# Altium PCB PCB.PcbDoc
Units mm, origin at the board's own origin, x right, y up, seen from the top; angles counter-clockwise.
Board outline 24 x 9 mm, 2 copper layers (Top Layer, Bottom Layer), stack 1.57 mm thick; 16 components, 9 nets, 36 pads, 19 vias.
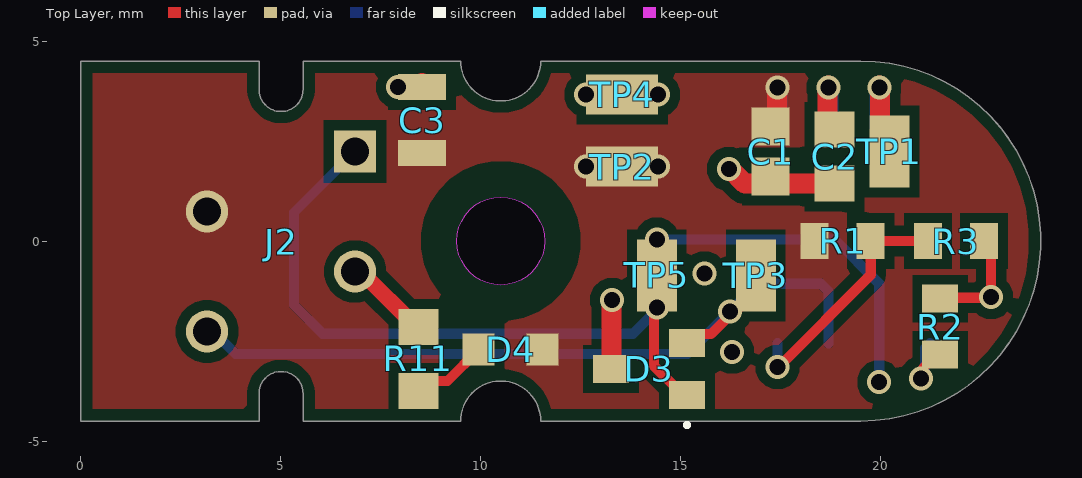
[diagram p0: Top Layer view]
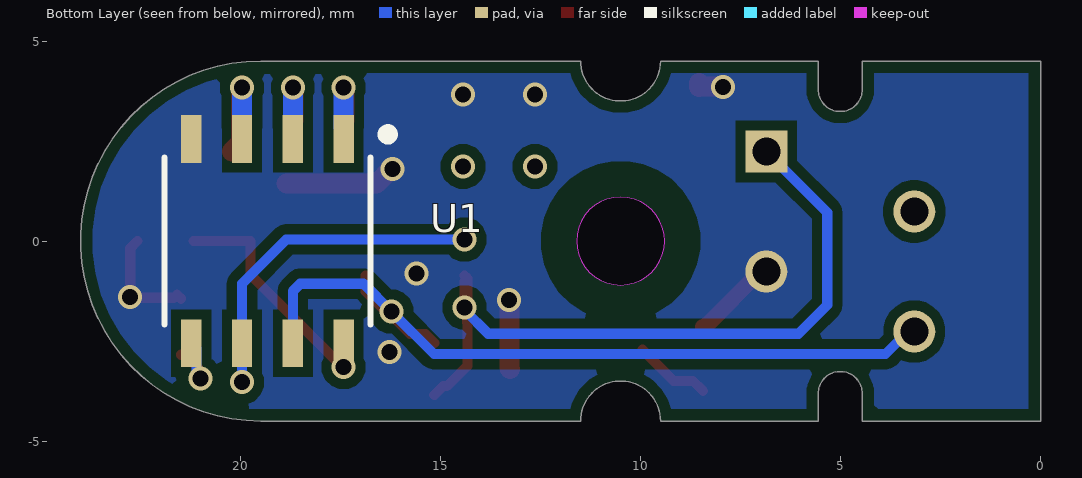
[diagram p1: Bottom Layer view, seen from below]
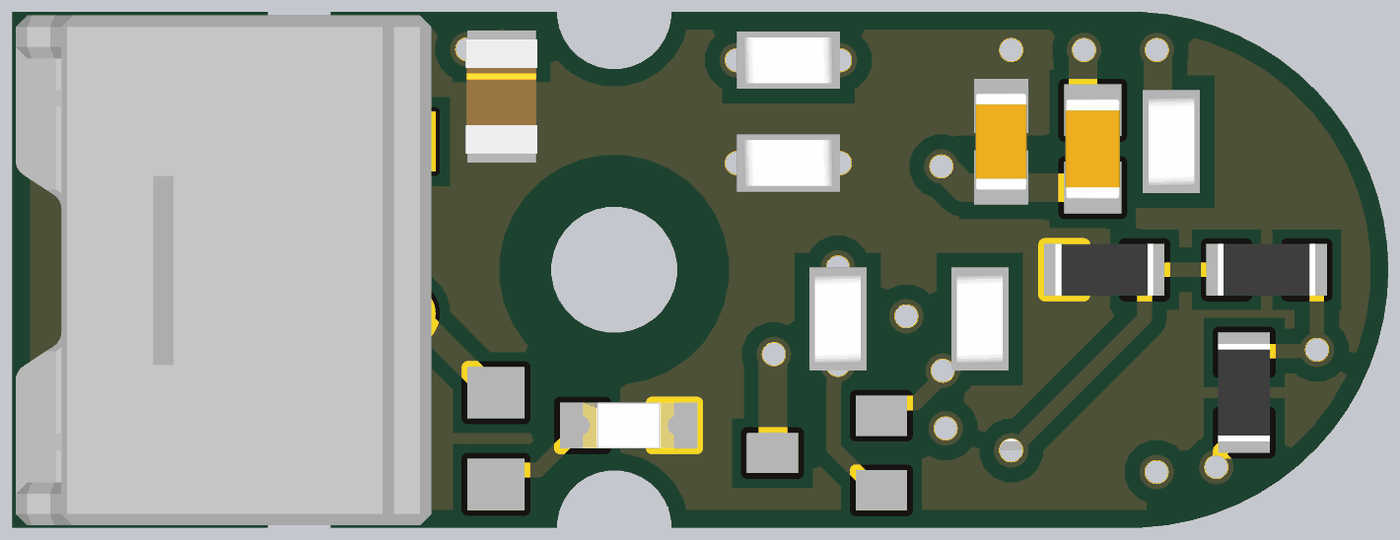
[diagram p2: 3D render of the assembled board from above, using the file's embedded part models]

## Layer stack, top to bottom
Top Solder: solder mask 0.01, Solder Resist, Dk 3.5
Top Layer: signal copper 0.035
Dielectric 1: dielectric 1.5, FR-4, Dk 4.8
Bottom Layer: signal copper 0.035
Bottom Solder: solder mask 0.01, Solder Resist, Dk 3.5

## Board outline
4.458,-4.5 4.458,-3.812 cw(c5.008,-3.812) 5.558,-3.812 5.558,-4.5 9.5,-4.5 cw(c10.5,-4.5) 11.5,-4.5 19.5,-4.5 ccw(c19.5,0) 19.5,4.5 11.5,4.5 cw(c10.5,4.5) 9.5,4.5 5.558,4.5 5.558,3.788 cw(c5.008,3.788) 4.458,3.788 4.458,4.5 0,4.5 0,-4.5
cut-out: 10.5,-1.1 cw(c10.5,0) 9.4,0 cw(c10.5,0) 10.5,1.1 cw(c10.5,0) 11.6,0 cw(c10.5,0)

## Design rules (kind name [scope] priority, off if disabled: settings)
AcuteAngle [All] p1: minimum=6.00000000000000E+0001 checktracksonly=FALSE
AssemblyTestPointUsage [All] p1: valid=2
BoardOutlineClearance [All] p1: gap=0.3 ignorepadtopadclearanceinfootprint=FALSE except(0: Arc-OutlineEdge Arc-CavityEdge Arc-CutoutEdge Arc-SplitBarrior Arc-SplitContinuation Track-SplitContinuation SMDPad-SplitContinuation THPad-SplitContinuation Via-SplitContinuation Fill-SplitContinuation Poly-SplitContinuation Region-SplitContinuation Text-SplitContinuation; 0.254: Region-OutlineEdge Region-CavityEdge Region-CutoutEdge Region-SplitBarrior Text-OutlineEdge Text-CavityEdge Text-CutoutEdge Text-SplitBarrior)
Clearance [All] p1: gap=0.254 ignorepadtopadclearanceinfootprint=TRUE except(0: Arc-Hole Track-Hole SMDPad-Hole THPad-Hole Via-Hole Fill-Hole Poly-Hole Region-Hole Text-Hole)
FabricationTestPointUsage [All] p1: valid=2 allowmultiple=FALSE
HoleSize [All] p1: absolutevalues=TRUE maxlimit=6.3 minlimit=0.025 maxpercent=80.000 minpercent=20.000
MinimumSolderMaskSliver [All] p1: minsoldermaskwidth=0.1
NetAntennae [All] p1 off: netantennaetolerance=1
PolygonConnect Vias [IsVia] p1: connectstyle=Direct reliefconductorwidth=0.254 reliefentries=4 polygonreliefangle="90 Angle" airgapwidth=0.254
PolygonConnect DirectClass [InPadClass('Direct')] p2: connectstyle=Direct reliefconductorwidth=0.254 reliefentries=4 polygonreliefangle="90 Angle" airgapwidth=0.254
PolygonConnect [All] p3: connectstyle=Relief reliefconductorwidth=0.254 reliefentries=4 polygonreliefangle="90 Angle" airgapwidth=0.254
RoutingVias [All] p1: holewidth=0.4 width=0.6 viastyle="Through Hole" minholewidth=0.3 minwidth=0.5 maxholewidth=1 maxwidth=2
SolderMaskExpansion [All] p1: expansion=0.102 istentingtop=FALSE
UnRoutedNet [All] p1: checkbadconnections=TRUE
Width [All] p1: maxlimit=1 minlimit=0.254 preferedwidth=0.254
24 further rules are at their usual default settings.

## Classes and differential pairs
pad class Direct: C1-2 C2-2 C3-1 C3-2 D4-2 J2-2 J2-3 R1-1 R1-2 TP2-1 TP4-1 U1-1 U1-2 U1-4
component class Encoder: C1 C2 R1 R2 R3 TP1 U1
component class Connectors: C3 D3 D4 J2 R11 TP2 TP3 TP4 TP5

## Components (designator, comment, footprint, x,y, rotation, side; value= is the part's Value field where it differs from the comment)
C1 "Capacitor 100 nF +/-10% 50 V 0603" CAPC1608X90X40NL10T20 17.249,2.235 r90 top value=100nF
C2 "Capacitor 1uF +/- 10% 16V 0603" CAPC1608X90X35NL15T15 18.847,2.109 r90 top value=1µF
C3 "CAP CER 10UF 16V X5R 0805" "CAP CER 10UF 16V X5R 0805-Footprint-1" 8.534,3.023 r270 top value=10µF
D3 "DF3A6.8FUT1G" ONSC-SC-70-3-419-04_V 14.209,-3.199 r180 top
D4 "150060RS75000" WL-SMCW_0603_150060xx75000 10.75,-2.718 r0 top
J2 "5031750400" 5031750400-Footprint-1 6.858,2.238 r270 top
R1 "Resistor 10k +/-1% 0603 100 mW" RESC1608X55X25NL10T15 19.05,0 r180 top value=10k
R2 "Resistor 10k +/-1% 0603 100 mW" RESC1608X55X25NL10T15 21.487,-2.143 r90 top value=10k
R3 "Resistor 10k +/-1% 0603 100 mW" RESC1608X55X25NL10T15 21.881,0 r180 top value=10k
R11 "RC0603JR-07180RL" RESC0603(1608)_N 8.439,-2.946 r270 top value=180
TP1 "RCUCTE" FP-S2761-46R-MFG 20.217,2.235 r90 top
TP2 "RCUCTE" FP-S2761-46R-MFG 13.538,1.862 r180 top
TP3 "RCUCTE" FP-S2761-46R-MFG 16.877,-0.86 r90 top
TP4 "RCUCTE" FP-S2761-46R-MFG 13.538,3.658 r0 top
TP5 "RCUCTE" FP-S2761-46R-MFG 14.402,-0.86 r270 top
U1 "AS5600L-ASOM" AS5600L-ASOM-Footprint-1 19.5,0 r270 bottom locked

## Footprints (in the part's own frame and the unit in brackets; to place one, negate y for a bottom-side part, rotate by r counter-clockwise, add the part's x,y. Pads: shape width x height; smd on the part's side, far side on the other; paste and mask are expansions set on the pad)
5031750400-Footprint-1 [mm]
  rect 1.05x1.05 / inner round 1.524 / far side rect 1.05x1.05 hole 0.7 paste-2539.97 mask+0.076: 1(0,0)
  round 1.05 / inner round 1.524 / far side round 1.05 hole 0.7 paste-2539.97 mask+0.076: 2(1.5,-3.7) 3(3,0) 4(4.5,-3.7)
  body extent -2.2,-6.8 6.7,0.45, height 6.96
AS5600L-ASOM-Footprint-1 [mil] "AS5600L-ASOM-Footprint"
  rect 47.11x20 smd paste+0 mask+0: 1(-100.56,81.77) 2(-100.56,31.77) 3(-100.56,-18.23) 4(-100.56,-68.23) 5(100.56,-68.23) 6(100.56,-18.23) 7(100.56,31.77) 8(100.56,81.77)
  silkscreen extent -110,-95 82,130, body extent -118,-90 118,103, height 69
"CAP CER 10UF 16V X5R 0805-Footprint-1" [mm]
  rect 0.652x1.199 smd paste+0 mask+0: 1(-0.826,0) 2(0.826,0)
  body extent -1,-0.63 1,0.63, height 1.35
CAPC1608X90X35NL15T15 [mm] "Chip Capacitor, 2-Leads, Body 1.75x0.95mm, IPC Medium Density"
  rect 0.9x1 smd: 1(-0.675,0) 2(0.675,0)
  body extent -0.87,-0.48 0.87,0.48, height 0.9
CAPC1608X90X40NL10T20 [mm] "Chip Capacitor, 2-Leads, Body 1.70x0.90mm, IPC Medium Density"
  rect 0.95x0.95 smd mask+0: 1(-0.625,0) 2(0.625,0)
  body extent -0.85,-0.45 0.85,0.45, height 0.9
FP-S2761-46R-MFG [mm]
  rect 1.8x1 smd paste+0 mask+0: 1(0,0)
  body extent -0.8,-0.4 0.8,0.4, height 1.28
ONSC-SC-70-3-419-04_V [mm] "SOT23, 3-Leads, Body 2x1.25mm, Pitch 0.65mm"
  rect 0.9x0.7 smd: 1(-0.95,0.65) 2(-0.95,-0.65) 3(0.95,0)
  silkscreen extent -1,1.35 -0.9,1.45, body extent -0.63,-1 0.63,1, height 1
RESC0603(1608)_N [mm] "Chip Resistor, Body 1.6x0.8mm, IPC Medium Density"
  rect 0.9x1 smd: 1(-0.8,0) 2(0.8,0)
  body extent -0.85,-0.47 0.85,0.47, height 0.6
RESC1608X55X25NL10T15 [mm] "Chip Resistor, 2-Leads, Body 1.70x0.90mm, IPC Medium Density"
  rect 0.7x0.9 smd: 1(-0.7,0) 2(0.7,0)
  body extent -0.85,-0.45 0.85,0.45, height 0.55
WL-SMCW_0603_150060xx75000 [mm] "SMD Mono-color Chip LED, body 1.6x0.8mm"
  rect 0.8x0.8 smd: 1(-0.8,0) 2(0.8,0)
  body extent -0.8,-0.4 0.8,0.4, height 0.7

## Part data
C1: library part CMP-001-00017-8, "Chip Capacitor, 100 nF, +/- 10%, 50 V, 0603 (1608 Metric)", Capacitor Type=Ceramic, Case/Package=0603, Max Operating Temperature=125°C, Min Operating Temperature=-55°C, Tolerance=10%, Voltage Rating=50V, Mounting Technology=SM, Pins=2, RoHS Compliant=True
C2: library part CMP-001-00004-8, "Chip Capacitor, 1 uF, +/- 10%, 16 V, 0603 (1608 Metric)", Capacitor Type=Ceramic, Case/Package=0603, Max Operating Temperature=125°C, Min Operating Temperature=-55°C, Tolerance=10%, Voltage Rating=16V, Mounting Technology=SM, Pins=2, RoHS Compliant=True
C3: library part CMP-001-00084-6, "Ceramic Capacitor, Multilayer, Ceramic, 16V, 10% +Tol, 10% -Tol, X5R, 15% TC, 10uF, Surface Mount, 0805", Capacitor Type=Ceramic, Case/Package=0805, Max Operating Temperature=85°C, Min Operating Temperature=-55°C, Voltage Rating=16V, Mounting Technology="Surface Mount", Pins=2, RoHS Compliant=Yes
D3: library part CMP-004-00039-1, "Trans Voltage Suppressor Diode, 150W, Unidirectional, 2 Element, Silicon", Max Breakdown Voltage=7.2V, Max Operating Temperature=150°C, Max Power Dissipation=200mW, Min Breakdown Voltage=6.4V, Min Operating Temperature=-55°C, Non-rep Peak Rev Power Dis-Max=150W, Package Body Material=Plastic, Package Shape=Rectangular, Package Style="SMALL OUTLINEMeter", Peak Reflow Temperature (Cel)=260°C, Reference Voltage-Nom=6.8V, Test Current=5mA, Time @ Peak Reflow Temperature-Max (s)=40s, Voltage Tol-Max=5.9%, Diode Element Material=SILICON, Diode Type="TRANS VOLTAGE SUPPRESSOR", Dynamic Impedance-Max=50R, JESD-30 Code=R-PDSO-G3, JESD-609 Code=e3, Moisture Sensitivity Level=1, Number of Elements=2, Pins=3, Polarity=Unidirectional, Qualification Status="Not Qualified", Reach SVHC Compliant=Yes, RoHS Compliant=Yes, Surface Mount=Yes, Technology=ZENER, Terminal Finish=Tin, Terminal Form="Gull Wing", Terminal Position=DUAL
D4: library part CMP-007-00036-1, "Single Color LED, Red, Water Clear, 1.1mm", Forward Current=30mA, Max Operating Temperature=85°C, Min Operating Temperature=-40°C, Mounting Technology="Surface Mount", Pins=2, RoHS Compliant=Yes
J2: library part CMP-002-00074-2, "DIP Connector, 4 Contact(s), 2 Row(s), Female, Right Angle, 0.059 inch Pitch, Solder Terminal, Locking, Beige Insulator, Receptacle", Max Operating Temperature=85°C, Min Operating Temperature=-85°C, Connector Type=DIP, Mounting Technology=Board, RoHS Compliant=Yes
R1 R2 R3: library part CMP-009-00017-7, "Chip Resistor, 10 KOhm, +/- 1%, 01 W, -55 to 155 degC, 0603 (1608 Metric)", Case/Package=0603, Max Operating Temperature=155°C, Min Operating Temperature=-55°C, Power=100mW, Tolerance=1%, Voltage Rating=50V, Mounting Technology=SM, Pins=2, RoHS Compliant=True
R11: library part CMP-009-00178-1, "Fixed Resistor, Metal Glaze/thick Film, 0.1W, 180ohm, 75V, 5% +/-Tol, 100ppm/Cel, Surface Mount, 0603", Case/Package=0603, Max Operating Temperature=155°C, Min Operating Temperature=-55°C, Power=100mW, Tolerance=5%, Mounting Technology="Surface Mount", Pins=2, RoHS Compliant=Yes
TP1 TP2 TP3 TP4 TP5: library part CMP-002-00072-5, "Test point", Case/Package=0603, Max Operating Temperature=125°C, Min Operating Temperature=-55°C, Connector Type="Interconnection Device", Mounting Technology="Surface Mount", Pins=2, RoHS Compliant=Yes
U1: library part CMP-010-00024-5, "AS5600L Series 12-Bit Programmable On-Axis Magnetic Rotary Position Sensor", Case/Package=SOIC-8, Max Operating Temperature=125°C, Max Supply Voltage=5V, Min Operating Temperature=-40°C, Min Supply Voltage=3.3V, Mounting Technology=SMD, Pins=8, Sensor Type="Magnetic Rotary Position Sensor"

## Via types
v1: diameter 0.6, hole 0.4, Top Layer to Bottom Layer, tented both sides, 19 vias

## Nets (pads, with @x,y where several pads share a name; then routed paths per layer and width w, separated by ;. In a path a pad name is that pad's centre, name@x,y a point inside that pad or via, vN(x,y) a via of type N, cw(c..) or ccw(c..) an arc to the next point about the centre after c; other vN are vias at no path point)
+5V0: C1.2 C3.2 D4.2 J2.2 R1.2 TP2.1 U1.1 | length 1.8
  Top Layer w0.5: C1.2@17.405,3.016 v1@17.405,3.791 ; v1@17.405,3.867 v1@17.424,3.886
  Bottom Layer w0.5: U1.1@17.424,2.835 v1@17.424,3.81
  other v1: 12.637,1.861 14.437,1.861 17.424,3.835
GND: C1.1 C2.1 C3.1 D3.3 J2.3 R2.2 R3.1 R11.1 TP4.1 U1.4 | length 10.3
  Top Layer w0.254: R2.2 21.589,-1.341 21.667,-1.42 22.735,-1.42 v1(22.758,-1.397) 22.758,-0.178 R3.1
  Top Layer w0.4: J2.3 7.004,-0.762 8.389,-2.146 R11.1
  Top Layer w0.5: v1(7.935,3.849) 7.954,3.868 8.452,3.868 8.534,3.95 C3.1 ; D3.3 13.271,-3.186 13.271,-1.486 v1(13.284,-1.473) ; v1(16.205,1.803) 16.232,1.803 16.602,1.434 C2.1
  other v1: 16.281,-2.769 15.596,-0.813 12.637,3.657 14.437,3.657
NetC2_2: C2.2 U1.2 | length 1.8
  Top Layer w0.5: C2.2@18.675,3.016 v1@18.675,3.791 ; v1@18.675,3.867 v1@18.694,3.886
  Bottom Layer w0.5: U1.2@18.694,2.835 v1@18.694,3.81
  other v1: 18.694,3.835
NetD3_1: D3.1 J2.1 TP5.1 U1.6 | length 26.7
  Top Layer w0.254: v1(14.402,-1.66) TP5.1@14.402,-1.013 ; TP5.1 14.328,-0.934 14.328,-1.66 14.336,-1.668 14.336,-2.033 14.328,-2.041 14.328,-3.118 14.836,-3.626 14.934,-3.626 D3.1@15.159,-3.85
  Bottom Layer w0.254: J2.1 5.334,0.714 5.334,-1.6 6.052,-2.318 13.807,-2.318 14.402,-1.723 v1(14.402,-1.66) ; v1(14.402,0.04) 18.858,0.04 19.964,-1.067 U1.6 U1.6 ; v1(19.962,-3.531) U1.6@19.962,-2.555
NetD3_2: D3.2 J2.4 TP3.1 U1.7 | length 20.5
  Top Layer w0.254: D3.2 15.382,-2.326 15.761,-2.326 16.164,-1.923 16.164,-1.921 16.25,-1.834 16.303,-1.834 16.877,-1.26 TP3.1
  Bottom Layer w0.254: J2.4 3.312,-2.262 3.875,-2.826 15.165,-2.826 v1(16.23,-1.761) 16.924,-1.067 18.506,-1.067 18.693,-1.254 U1.7
NetD4_1: D4.1 R11.2 | length 1.9
  Top Layer w0.254: R11.2 8.688,-3.497 9.17,-3.497 D4.1
NetR1_1: R1.1 R3.2 U1.8 | length 6.2
  Top Layer w0.254: v1(17.423,-3.152) 17.444,-3.152 19.75,-0.847 R1.1 20.35,0 R3.2
  Bottom Layer w0.254: v1(17.423,-3.152) U1.8
NetR2_1: R2.1 U1.5 | length 1.8
  Top Layer w0.254: v1(21.002,-3.443) 21.068,-3.377 21.068,-3.162 21.387,-2.843 R2.1
  Bottom Layer w0.254: v1(21.002,-3.443) 21.002,-3.349 21.106,-3.245 21.106,-2.681 U1.5@21.232,-2.555
OUT: TP1.1 U1.3 | length 2.7
  Top Layer w0.5: v1@19.945,3.867 19.964,3.886 v1@19.984,3.867 ; v1@19.984,3.791 19.984,2.469 TP1.1
  Bottom Layer w0.5: U1.3@19.964,2.835 v1@19.964,3.81
  other v1: 19.964,3.835

## Polygon pours and split planes (outlines as drawn)
GND on Bottom Layer "GND" (solid, pour order 6): 0,-4.5 0,4.5 19.5,4.5 cw(c19.5,0) 19.5,-4.5
+5V0 on Top Layer "5V" (solid, pour order 5): 0,-4.5 0,4.5 19.5,4.5 cw(c19.5,0) 19.5,-4.5

## Other copper
Top Layer:
  pour cut-out: 10.5,-2 cw(c10.5,0) 8.5,0 cw(c10.5,0) 10.5,2 cw(c10.5,0) 12.5,0 cw(c10.5,0)
Bottom Layer:
  pour cut-out: 10.5,-2 cw(c10.5,0) 8.5,0 cw(c10.5,0) 10.5,2 cw(c10.5,0) 12.5,0 cw(c10.5,0)

## Silkscreen, mask and mechanical layers (free items; w line width, h text height)
Mechanical 1:
  circle w0.013: c10.5,0 r1.1
  lines w0.1: 19,0 20,0 ; 19.5,-0.5 19.5,0.5 ; 0,-4.5 4.458,-4.5 4.458,-3.812 cw(c5.008,-3.812) 5.558,-3.812 5.558,-4.5 9.5,-4.5 cw(c10.5,-4.5) 11.5,-4.5 19.5,-4.5 ccw(c19.5,0) 19.5,4.5 11.5,4.5 cw(c10.5,4.5) 9.5,4.5 5.558,4.5 5.558,3.788 cw(c5.008,3.788) 4.458,3.788 4.458,4.5 0,4.5 0,-4.5